# Altium PCB MCA_DA_AudioMetter-V2.PcbDoc
Units mil, origin at the board's own origin, x right, y up, seen from the top; angles counter-clockwise.
Board outline 6071 x 4499.19 mil, 2 copper layers (Top Layer, Bottom Layer); 113 components, 69 nets, 301 pads, 0 vias.
Unrouted connection lines stored in the file: 10.
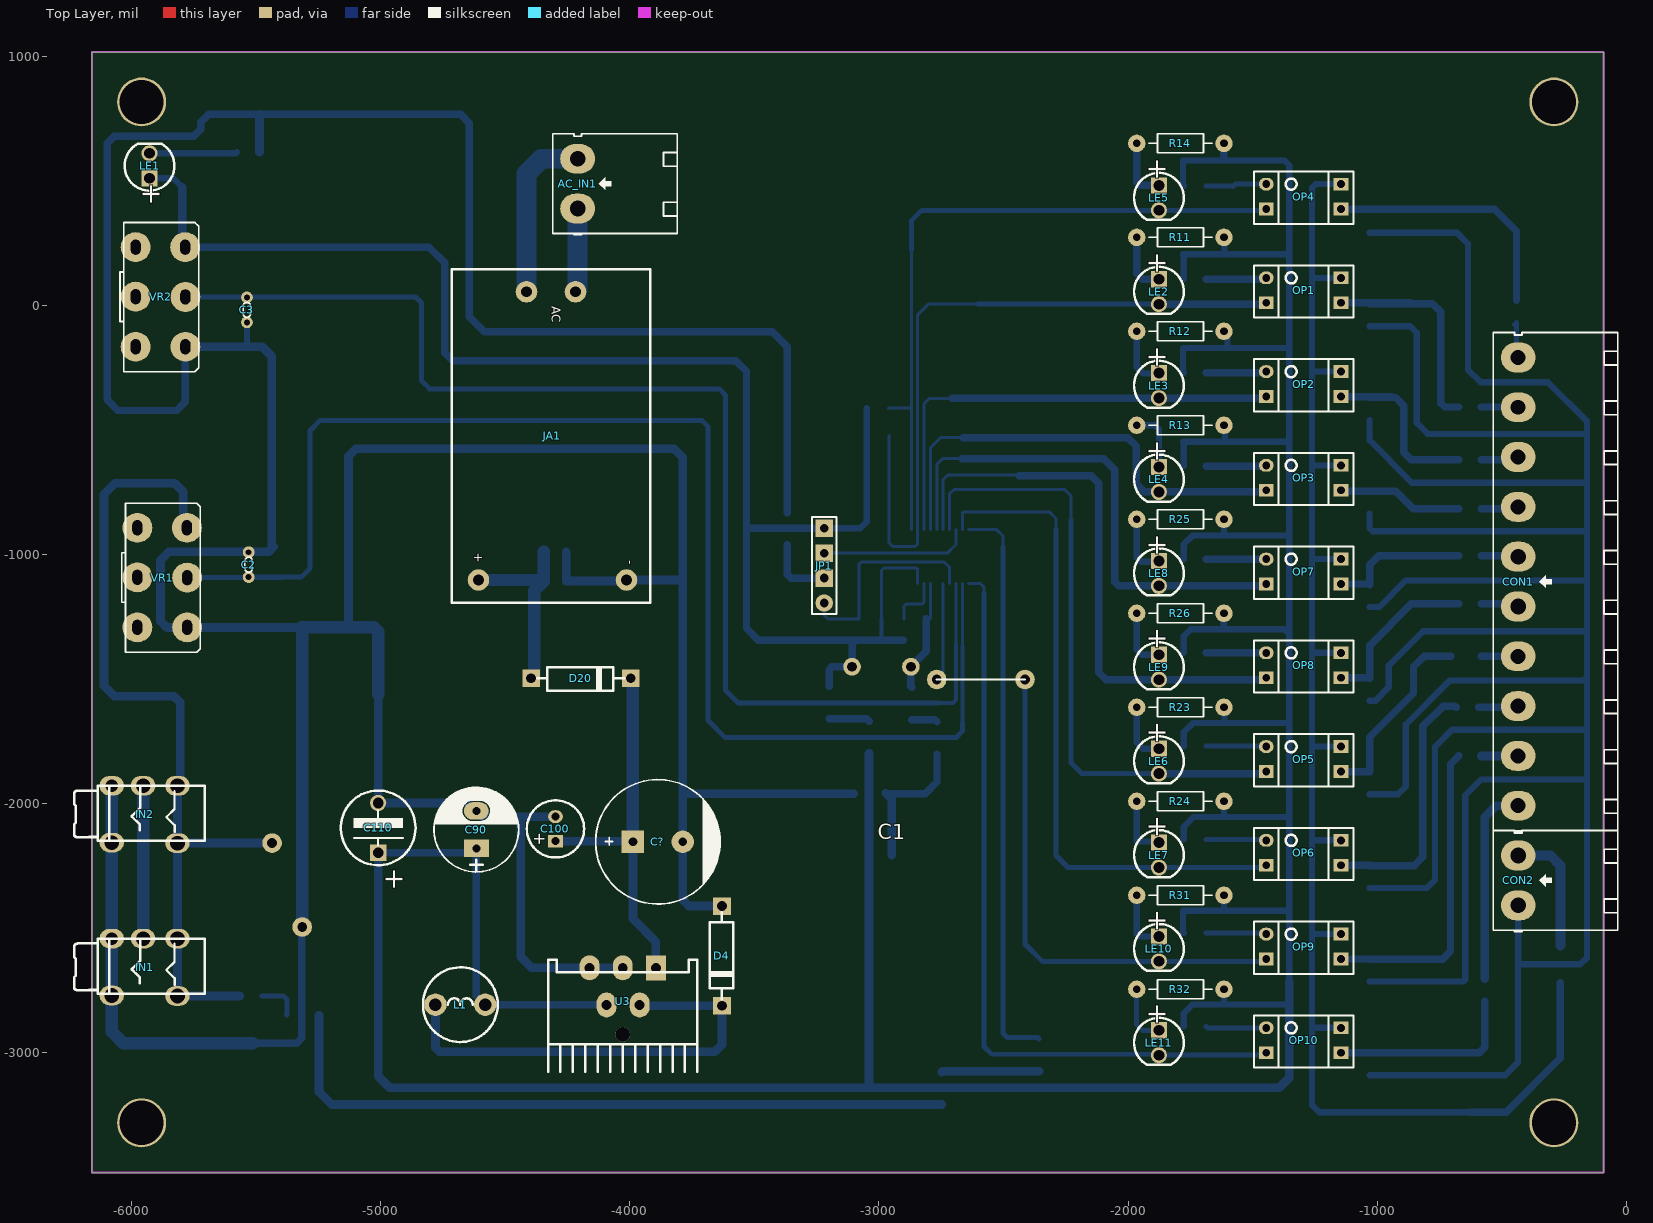
[diagram p0: Top Layer view]
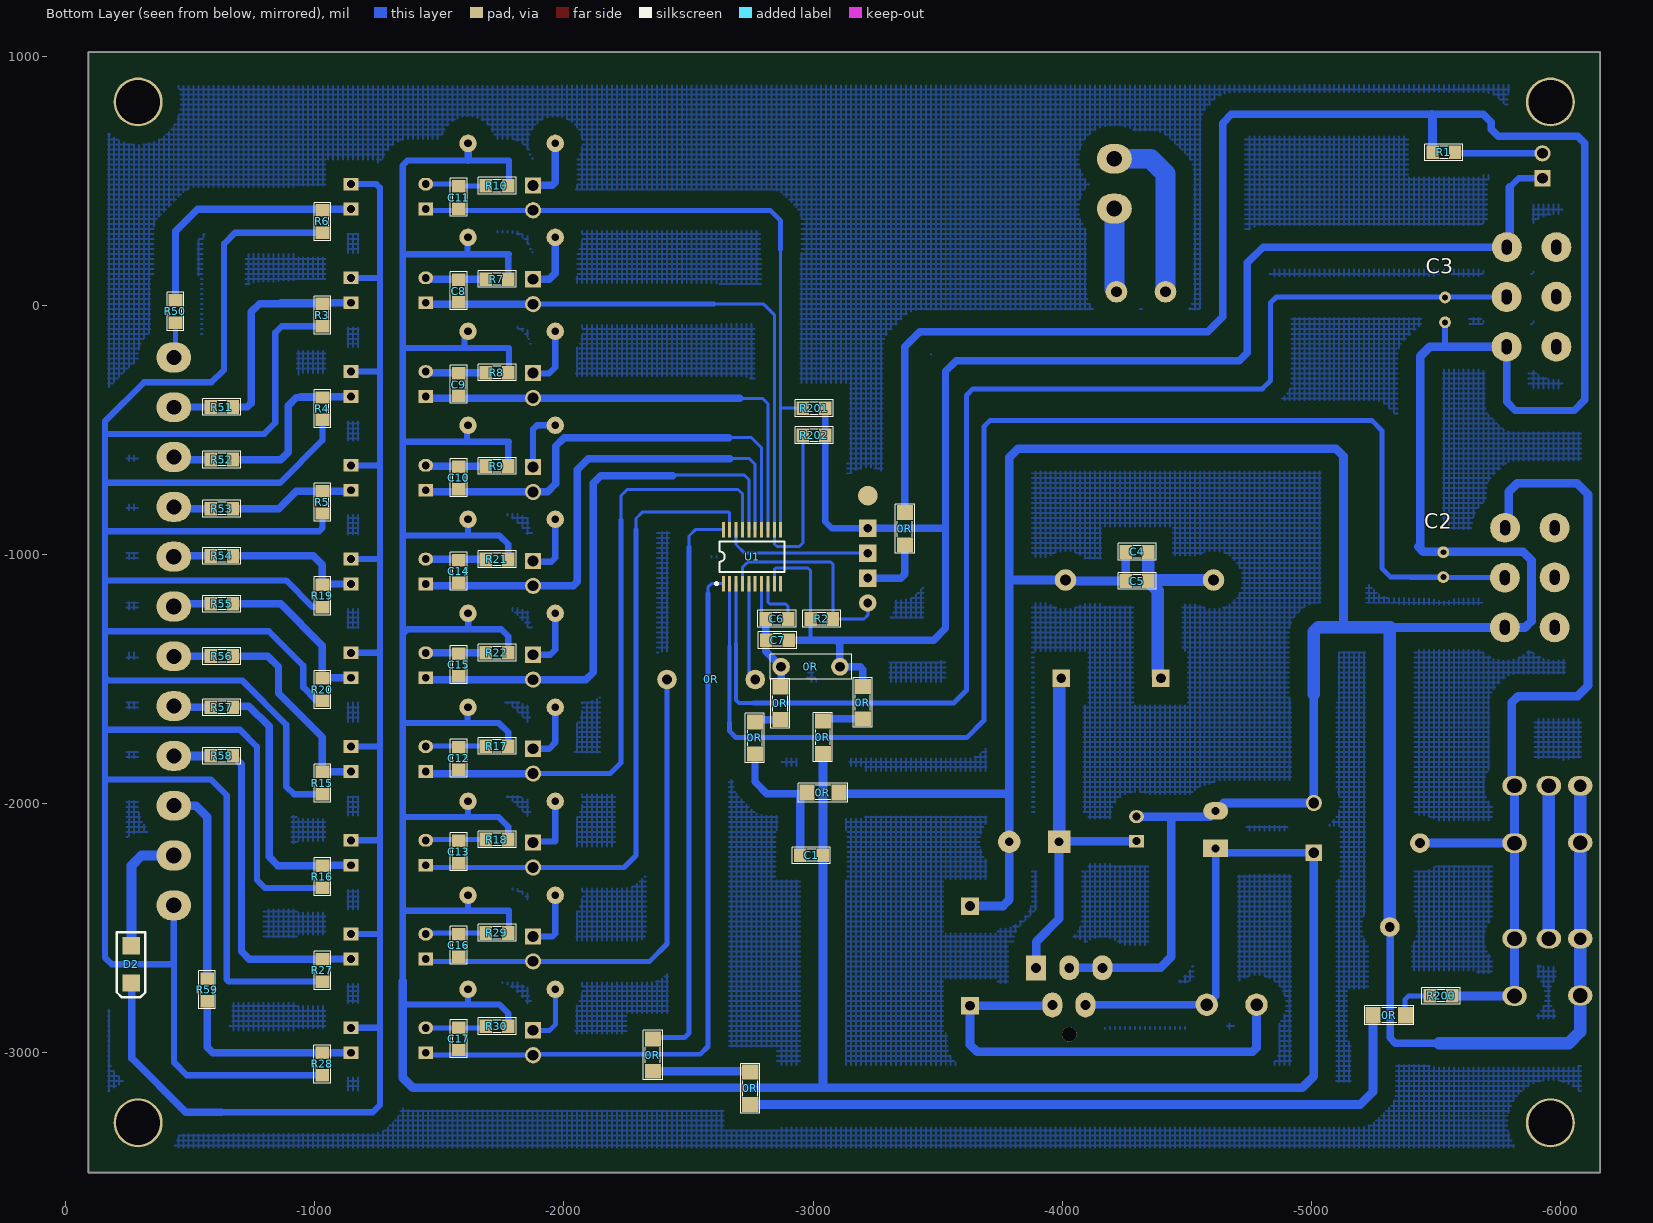
[diagram p1: Bottom Layer view, seen from below]

## Layer stack, top to bottom
Top Solder: solder mask 0.4, Solder Resist, Dk 3.5
Top Layer: signal copper 1.4
Dielectric 1: dielectric 12.6, FR-4, Dk 4.8
Bottom Layer: signal copper 1.4
Bottom Solder: solder mask 0.4, Solder Resist, Dk 3.5

## Board outline
-6161,-3483 -6161,1016.19 -90,1016.19 -90,-3483

## Design rules (kind name [scope] priority, off if disabled: settings)
Clearance [All] p1: gap=10 except(70: Arc-Poly Track-Poly SMDPad-Poly THPad-Poly Via-Poly Fill-Poly Poly-Poly)
PolygonConnect [All] p1: connectstyle=Relief reliefconductorwidth=10 reliefentries=4 polygonreliefangle="90 Angle" airgapwidth=10
RoomDefinition MCA_DA_AudioMetter-V2 [InComponentClass('MCA_DA_AudioMetter-V2')] p1: confinementstyle=ConfineIn formatcopy=TRUE lockcomponents=FALSE outline -18952.99,-6714.81 -16952.99,-6714.81 -16952.99,-5714.81 -18952.99,-5714.81
RoutingVias [All] p1: holewidth=28 width=50 viastyle="Through Hole" minholewidth=28 minwidth=50 maxholewidth=28 maxwidth=50
SolderMaskExpansion [All] p1: expansion=4
Width [All] p1: maxlimit=80 minlimit=12 preferedwidth=25
30 further rules are at their usual default settings.

## Components (designator, comment, footprint, x,y, rotation, side; value= is the part's Value field where it differs from the comment)
0R "Comment" GIM -2768,-1503 r0 bottom
0R "Comment" TRO_SMD_1206 -5316,-2854 r0 bottom
0R "Comment" TRO_SMD_1206 -2751,-3142.81 r270 bottom
0R "Comment" TRO_SMD_1206 -2360,-3009 r270 bottom
0R "Comment" TRO_SMD_1206 -3037,-1736.81 r90 bottom
0R "Comment" TU_TATA_5.08 -2990,-1451.81 r0 bottom
0R "Comment" TRO_SMD_1206 -3372,-895.81 r270 bottom
0R "Comment" TRO_SMD_1206 -3042,-1959.81 r0 bottom
0R "Comment" TRO_SMD_1206 -2764,-1739.81 r90 bottom
0R "Comment" TRO_SMD_1206 -2866,-1600.81 r90 bottom
0R "Comment" TRO_SMD_1206 -3197,-1597.78 r90 bottom
AC_IN1 "CON 2 EDG 5.08_MH" "CON 2 EDG 5.08" -4210,488 r90 top
C1 "104" 0805-CAP -2994,-2208.81 r180 bottom
C2 "Capacitor Ceramic" Tu-pico -5531,-991.81 r270 top
C3 "Capacitor Ceramic" Tu-pico -5537.99,-68.81 r90 top
C4 "104" 0805-CAP -4301,-990.81 r0 bottom
C5 "104" 0805-CAP -4301,-1107.81 r0 bottom
C6 "106" 0805-CAP -2855,-1259.81 r0 bottom
C7 "104" 0805-CAP -2858,-1344.81 r180 bottom
C8 "Capacitor Ceramic" "Tu 0805" -1578,56.86 r270 bottom
C9 "Capacitor Ceramic" "Tu 0805" -1578,-318.48 r270 bottom
C10 "Capacitor Ceramic" "Tu 0805" -1578,-693.81 r270 bottom
C11 "Capacitor Ceramic" "Tu 0805" -1578,432.19 r270 bottom
C12 "Capacitor Ceramic" "Tu 0805" -1578,-1819.81 r270 bottom
C13 "Capacitor Ceramic" "Tu 0805" -1578,-2195.14 r270 bottom
C14 "Capacitor Ceramic" "Tu 0805" -1578,-1069.14 r270 bottom
C15 "Capacitor Ceramic" "Tu 0805" -1578,-1444.48 r270 bottom
C16 "Capacitor Ceramic" "Tu 0805" -1578,-2570.48 r270 bottom
C17 "Capacitor Ceramic" "Tu 0805" -1578,-2945.81 r270 bottom
C90 "100uF/16V" "TU_HOA(100uF/35V - 470uF/16V)" -4617,-2105.81 r90 top
C100 "100uF - 35V" "TU HOA 8mm" -4299,-2102.81 r90 top
C110 "1000uF - 16V" "TU HOA 1000uF25V" -5011,-2098.81 r270 top
C? "10uF" CP2/5 -3888,-2154.81 r0 top
CON1 "CON 10 EDG 5.08_MH" "Con 10 EDG 5.08" -433.2,-1109.81 r90 top
CON2 "CON 2 EDG 5.08_MH" "CON 2 EDG 5.08" -433,-2309.81 r90 top
D2 "SS34" SOD80 -263,-2646.81 r90 bottom
D4 "ss34" SS14 -3633,-2593.81 r270 top
D20 "Diode 1N4001 DO41 1A 50V (DIP)_MH" SS14 -4216,-1500.81 r0 top
IN1 "Jack Audio 3.5MM PJ-327 5P_MH" "Jac audio 3.5" -5949,-2658.81 r0 top
IN2 "Jack Audio 3.5MM PJ-327 5P_MH" "Jac audio 3.5" -5949,-2044.81 r0 top
JA1 "AC - Input" "Nguon HiLink 5V" -4317,-524.81 r270 top
JP1 "ST-Link" "Jumper 4" -3220,-1144.81 r90 top
L1 "100uH/3A" L100uH3A -4681,-2808.81 r0 top
LE1 "LED" "LED_phi 3" -5929,560 r90 top
LE2 "LED" "LED_phi 3" -1876,54.19 r270 top
LE3 "LED" "LED_phi 3" -1876,-322.81 r270 top
LE4 "LED" "LED_phi 3" -1876,-699.81 r270 top
LE5 "LED" "LED_phi 3" -1876,431.19 r270 top
LE6 "LED" "LED_phi 3" -1876,-1830.81 r270 top
LE7 "LED" "LED_phi 3" -1876,-2207.81 r270 top
LE8 "LED" "LED_phi 3" -1876,-1076.81 r270 top
LE9 "LED" "LED_phi 3" -1876,-1453.81 r270 top
LE10 "LED" "LED_phi 3" -1876,-2584.81 r270 top
LE11 "LED" "LED_phi 3" -1876,-2961.81 r270 top
OP1 "PC817/EL817 5V 5mA DIP _MH" DIP4 -1445,109.74 r270 top
OP2 "PC817/EL817 5V 5mA DIP _MH" DIP4 -1445,-266.7 r270 top
OP3 "PC817/EL817 5V 5mA DIP _MH" DIP4 -1445,-643.14 r270 top
OP4 "PC817/EL817 5V 5mA DIP _MH" DIP4 -1445,486.19 r270 top
OP5 "PC817/EL817 5V 5mA DIP _MH" DIP4 -1445,-1772.48 r270 top
OP6 "PC817/EL817 5V 5mA DIP _MH" DIP4 -1445,-2148.92 r270 top
OP7 "PC817/EL817 5V 5mA DIP _MH" DIP4 -1445,-1019.59 r270 top
OP8 "PC817/EL817 5V 5mA DIP _MH" DIP4 -1445,-1396.03 r270 top
OP9 "PC817/EL817 5V 5mA DIP _MH" DIP4 -1445,-2525.37 r270 top
OP10 "PC817/EL817 5V 5mA DIP _MH" DIP4 -1445,-2901.81 r270 top
R1 "1K" 0805-RES -5533,614 r180 bottom
R2 "10K" 0805-RES -3035,-1259.81 r0 bottom
R3 "10k" "Tro SMD 0805" -1030,-39.7 r90 bottom
R4 "10k" "Tro SMD 0805" -1030,-415.59 r90 bottom
R5 "10k" "Tro SMD 0805" -1030,-791.48 r90 bottom
R6 "10k" "Tro SMD 0805" -1030,336.19 r90 bottom
R7 "220" "Tro SMD 0805" -1731,104.19 r0 bottom
R8 "220" "Tro SMD 0805" -1731,-270.81 r0 bottom
R9 "220" "Tro SMD 0805" -1731,-645.81 r0 bottom
R10 "220" "Tro SMD 0805" -1731,479.19 r0 bottom
R11 "1K" "TRO_VACH_ 1/4W" -1965,272.56 r0 top
R12 "1K" "TRO_VACH_ 1/4W" -1965,-104.89 r0 top
R13 "1K" "TRO_VACH_ 1/4W" -1965,-482.33 r0 top
R14 "1K" "TRO_VACH_ 1/4W" -1965,650 r0 top
R15 "10k" "Tro SMD 0805" -1030,-1919.14 r90 bottom
R16 "10k" "Tro SMD 0805" -1030,-2295.03 r90 bottom
R17 "220" "Tro SMD 0805" -1731,-1770.81 r0 bottom
R18 "220" "Tro SMD 0805" -1731,-2145.81 r0 bottom
R19 "10k" "Tro SMD 0805" -1030,-1167.37 r90 bottom
R20 "10k" "Tro SMD 0805" -1030,-1543.26 r90 bottom
R21 "220" "Tro SMD 0805" -1731,-1020.81 r0 bottom
R22 "220" "Tro SMD 0805" -1731,-1395.81 r0 bottom
R23 "1K" "TRO_VACH_ 1/4W" -1965,-1614.67 r0 top
R24 "1K" "TRO_VACH_ 1/4W" -1965,-1992.11 r0 top
R25 "1K" "TRO_VACH_ 1/4W" -1965,-859.78 r0 top
R26 "1K" "TRO_VACH_ 1/4W" -1965,-1237.22 r0 top
R27 "10k" "Tro SMD 0805" -1030,-2670.92 r90 bottom
R28 "10k" "Tro SMD 0805" -1029,-3046.81 r90 bottom
R29 "220" "Tro SMD 0805" -1731,-2520.81 r0 bottom
R30 "220" "Tro SMD 0805" -1731,-2895.81 r0 bottom
R31 "1K" "TRO_VACH_ 1/4W" -1965,-2369.56 r0 top
R32 "1K" "TRO_VACH_ 1/4W" -1965,-2747 r0 top
R50 "22R" "Tro SMD 0805" -440,-24.81 r90 bottom
R51 "22R" "Tro SMD 0805" -626,-408.81 r180 bottom
R52 "22R" "Tro SMD 0805" -626,-619.81 r180 bottom
R53 "22R" "Tro SMD 0805" -626,-816.81 r180 bottom
R54 "22R" "Tro SMD 0805" -626,-1006.81 r180 bottom
R55 "22R" "Tro SMD 0805" -626,-1198.81 r180 bottom
R56 "22R" "Tro SMD 0805" -626,-1408.81 r180 bottom
R57 "22R" "Tro SMD 0805" -626,-1614.81 r180 bottom
R58 "22R" "Tro SMD 0805" -626,-1809.81 r180 bottom
R59 "22R" "Tro SMD 0805" -567,-2749.81 r270 bottom
R200 "22R" "Tro SMD 0805" -5522,-2773 r180 bottom
R201 "10K" "Tro SMD 0805" -3004,-414 r0 bottom
R202 "10K" "Tro SMD 0805" -3004,-523 r0 bottom
U1 "STM8S003F3P6 TSSOP20 _MH" TSSOP20 -2755,-1009.81 r180 bottom
U3 "LM2576T TO220-5_MH" LM2576t -4028,-2827.81 r180 top
VR1 "20k" VR2-B -5878,-1093.81 r270 top
VR2 "20k" VR2-B -5885,33.19 r270 top

## Footprints (in the part's own frame and the unit in brackets; to place one, negate y for a bottom-side part, rotate by r counter-clockwise, add the part's x,y. Pads: shape width x height; smd on the part's side, far side on the other; paste and mask are expansions set on the pad)
0805-CAP [mil] "Compoment SMD 80x50mil"
  rect 50x55 smd: 1(-45,0) 2(45,0)
  silkscreen extent -77,-34 76,33, body extent -45,-24 34,25, height 31
0805-RES [mil] "Compoment SMD 80x50mil"
  rect 50x55 smd: 1(-45,0) 2(45,0)
  silkscreen extent -77,-34 76,33, body extent -48,-26 42,27, height 30
"CON 2 EDG 5.08" [mil]
  oval 120x140 hole 62.99: 1(-100,0) 2(100,0)
  silkscreen extent -205,-400 200,100, body extent -197,-399 197,73, height 334
"Con 10 EDG 5.08" [mil]
  oval 120x140 hole 60: 1(-900,0) 2(-700,0) 3(-500,0) 4(-300,0) 7(300,0) 8(500,0) 9(700,0) 10(900,0)
  oval 120x140 hole 62.99: 5(-100,0) 6(100,0)
  silkscreen extent -1005,-400 1000,100, body extent -996,-402 997,70, height 334
CP2/5 [mil] "Tu hoa 1000uF/25V,50V"
  rect 90x90 hole 35: 1(-100,0)
  round 90 hole 35: 2(100,0)
  silkscreen extent -250,-250 250,250, body extent -241,-247 251,245, height 984
DIP4 [mm] "W.300/L.400"
  oval 1.3x1.5 hole 0.8: 1(0,0)
  rect 1.3x1.5 hole 0.8: 2(2.54,0) 3(2.54,7.62) 4(0,7.62)
  silkscreen extent -1.27,-1.27 4.06,8.89, body extent -1.27,-1.27 4.06,8.89, height 5
GIM [mm]
  round 2 hole 1: 1(0,0) 1(9,0)
"Jac audio 3.5" [mm] "JAC audio 3.5"
  oval 2.5x2 hole 1.5: 1(-3.35,-2.875) 3(-0.15,2.925) 4(3.35,-2.925) 5(3.35,2.925)
  oval 2.5x2 hole 1.3: 2(-3.35,2.925)
  silkscreen extent -7.19,-2.7 6.15,2.9
"Jumper 4" [mil]
  round 70 hole 35 unplated: 1(-51,0)
  rect 70x70 hole 35 unplated: 2(49,0) 3(149,0) 4(249,0)
  silkscreen extent -95,-49 295,49
L100uH3A [mil] "100uH3A"
  round 90 hole 50: 1(-100,0) 2(100,0)
  silkscreen extent -150,-150 150,150
"LED_phi 3" [mil] "LED phi 3"
  rect 65x65 hole 43.31: 1(-50,0)
  round 65 hole 43.31: 2(50,0)
  silkscreen extent -100,-100 88,100
LM2576t [mil]
  rect 80x100 hole 40: 1(-132,-167.09)
  oval 80x100 hole 40: 2(-67,-18) 3(1,-167) 4(66,-18) 5(134,-167)
  round 59.06 hole 59.06: ""(1,100)
  silkscreen extent -299,-200 301,250, body extent -199,-175 201,150, height 859
"Nguon HiLink 5V" [mm] "HiLink 5V 3W"
  round 2.2 hole 1.1: 1(-14.7,-2.5) 2(-14.7,2.5) 3(14.7,-7.4) 4(14.7,7.7)
  silkscreen extent -17,-10.1 17,10.1
SOD80 [mil]
  rect 70x70 smd: 1(74.8,0) 2(-74.8,0)
  silkscreen extent -133,-56 129,59, body extent -73,-34 73,29, height 63
SS14 [mm]
  rect 1.8x1.8 hole 1: 1(-4.595,0.064) 2(5.565,0.064)
  silkscreen extent -3.96,-1.21 4.93,1.21, body extent -4.98,-1.22 5.95,1.35, height 2.55
"Tro SMD 0805" [mil]
  rect 50x55 smd: 1(-45,0) 2(45,0)
  silkscreen extent -77,-34 76,33, body extent -62,-28 56,27, height 21
TRO_SMD_1206 [mil]
  rect 60x65 smd: 1(-63,-3) 2(67,-3)
  silkscreen extent -97,-41 101,36, body extent -81,-38 85,33, height 25
"TRO_VACH_ 1/4W" [mil] "R 1/4W, 2 Pin, 350mil"
  round 70 hole 31: 1(0,0) 2(350,0)
  silkscreen extent 48,-38 302,38, body extent -40,-47 386,47, height 111
TSSOP20 [mm] "Shrink Small Outline; 20 Leads; Body Width 4.4 mm; Pitch 0.65 mm"
  rect 0.3x1.6 smd: 1(-2.925,-2.75) 2(-2.275,-2.75) 3(-1.625,-2.75) 4(-0.975,-2.75) 5(-0.325,-2.75) 6(0.325,-2.75) 7(0.975,-2.75) 8(1.625,-2.75) 9(2.275,-2.75) 10(2.925,-2.75) 11(2.925,2.75) 12(2.275,2.75) 13(1.625,2.75) 14(0.975,2.75) 15(0.325,2.75) 16(-0.325,2.75) 17(-0.975,2.75) 18(-1.625,2.75) 19(-2.275,2.75) 20(-2.925,2.75)
  silkscreen extent -3.75,-2.87 3.3,1.55
"Tu 0805" [mil] "Compoment SMD 80x50mil"
  rect 50x55 smd: 1(-45,0) 2(45,0)
  silkscreen extent -77,-34 76,33, body extent -40,-27 40,23, height 24
"TU HOA 8mm" [mm]
  rect 1.3x1.5 hole 0.8: 1(-1.25,0)
  oval 1.3x1.5 hole 0.8: 2(1.25,0)
  silkscreen extent -2.92,-2.92 2.92,2.92, body extent -3.15,-3.15 3.16,3.15, height 11.51
"TU HOA 1000uF25V" [mil]
  rect 65x65 hole 43.31: 1(100,0)
  round 65 hole 43.31: 2(-100,0)
  silkscreen extent -150,-150 150,150, body extent -195,-200 205,200, height 400
Tu-pico [mm] "Tu gom mini"
  round 1.2 hole 0.6: 1(0,0) 2(2.54,0)
  silkscreen extent 0.51,-0.38 2.03,0.38, body extent -1.65,-0.85 4.19,0.85, height 6.12
"TU_HOA(100uF/35V - 470uF/16V)" [mil]
  rect 70x100 hole 32: 1(-75,0)
  oval 70x100 hole 32: 2(75,0)
  silkscreen extent -170,-170 170,170, body extent -160,-157 155,157, height 446
TU_TATA_5.08 [mm]
  round 1.8 hole 1: 1(-3,0) 2(3,0)
  silkscreen extent -4.2,-1.3 4.1,1.3, body extent -2.79,-1.16 2.79,1, height 6.27
VR2-B [mil]
  round 120 hole 40 slot 60 at 0 deg: 1(-200,-100) 2(-1,-100) 3(200,-100) 4(-200,99) 5(0,100) 6(200,100)
  silkscreen extent -299,-163 300,153, body extent -339,-1409 331,199, height 835

## Part data
AC_IN1 CON2: "CON 2 EDG 5.08 (xanh cong)"
C1 C4 C5 C6 C7: library part "CAP SMD", "Capacitor"
C2 C3 C8 C9 C10 C11 C12 C13 C14 C15 C16 C17: library part CapCeramic, "Capacitor"
C90: library part TU_HOA_100uF_16V_MH, "TU_HOA_100uF_16V"
C100: library part "Tu Hoa 100uF 35V", "C?m"
C110: library part "Tu Nhom 1000uF - 16V", "Dán"
C?: library part TU_HOA_47uF_100V_MH, "TU_HOA_47uF_100V_MH"
CON1: "CON 10 EDG 5.08 (xanh cong)"
D2: library part "Diode 1N4148 SOD80 450mA 100V ( LL34 1N4148 SMD)_MH", "Diode 1N4148 SOD80 450mA 100V ( LL34 1N4148 SMD)"
D4: library part "Diode 1N4007 1A_MH", "Diode 1N4007 1A"
D20: "Diode 1N4001 DO41 1A 50V (DIP)"
JA1: library part NGUON_KHONGVO
JP1: library part "Jump 4_MH", "Jump 4P 2.54"
L1: library part L100uH3A, "Cuon cam"
LE1 LE2 LE3 LE4 LE5 LE6 LE7 LE8 LE9 LE10 LE11: library part LED_DIP_3MM
R1 R2: library part RESSMD
R3 R4 R5 R6 R7 R8 R9 R10 R11 R12 R13 R14 R15 R16 R17 R18 R19 R20 R21 R22 R23 R24 R25 R26 R27 R28 R29 R30 R31 R32 R50 R51 R52 R53 R54 R55 R56 R57 R58 R59 R200 R201 R202: library part TRO_SMD_0805_MH, "TRO_SMD_0805"
U3: "SIMPLE SWITCHER; 3A Step-Down Voltage Regulator"
VR1 VR2: library part "Triet Ap Doi 20k_MH", "Triet Ap Doi 20k"

## Free pads (board coordinates)
  round 196.85 hole 177.17: 2(-5961,-3283) 3(-290,-3283) 4(-290,816.19) 5(-5961,816.19)
  round 78.74 hole 39.37: 6(-5437,-2159.81) 7(-5316,-2496.81)
  round 78.74 smd far side: 8(-3220,-765)

## Nets (pads, with @x,y where several pads share a name; then routed paths per layer and width w, separated by ;. In a path a pad name is that pad's centre, name@x,y a point inside that pad or via, vN(x,y) a via of type N, cw(c..) or ccw(c..) an arc to the next point about the centre after c; other vN are vias at no path point)
24V: D2.2 OP1.4 OP2.4 OP3.4 OP4.4 OP5.4 OP6.4 OP7.4 OP8.4 OP9.4 OP10.4 | length 6269.2
  Bottom Layer w25: OP10.4 -1256,-2901.81 -1261,-2896.81 ; OP9.4 -1257.44,-2525.37 -1261,-2521.81 ; OP6.4 -1252.89,-2148.92 -1261,-2140.81 ; OP5.4 -1259.33,-1772.48 -1261,-1770.81 ; OP8.4 -1250.78,-1396.03 -1261,-1385.81 ; OP7.4 -1257.22,-1019.59 -1261,-1015.81 ; OP3.4 -1252.67,-643.14 -1261,-634.81 ; OP2.4 -1260.89,-266.7 -1261,-266.81 ; OP1.4 -1256.44,109.74 -1261,105.19 ; OP4.4 -1247,486.19 -1261,472.19 -1261,105.19 ; -625,-3240.81 -1232,-3240.81 -1261,-3211.81 -1261,-2896.81 ; -1261,-2896.81 -1261,-2521.81 ; -1261,-2521.81 -1261,-2140.81 ; -1261,-2140.81 -1261,-1770.81 ; -1261,-1770.81 -1261,-1385.81 ; -1261,-1385.81 -1261,-1015.81 ; -1261,-1015.81 -1261,-634.81 ; -1261,-634.81 -1261,-266.81 ; -1261,-266.81 -1261,105.19
  Bottom Layer w30: -625,-3240.81 -481.81,-3240.81 -264,-3023 D2.2@-264,-2721.61
ADC: IN1.4 IN1.5 IN2.4 IN2.5 pad.6 R200.2 VR1.4 | length 3408.3
  Bottom Layer w35: IN2.5 IN2.4 ; IN2.5@-5806.11,-1929.64 -5806.11,-1595.7 -5832,-1569.81 -6070,-1569.81 -6112,-1527.81 -6112,-758.81 -6068,-714.81 -5828,-714.81 -5794,-748.81 VR1.4@-5794,-894.81 ; R200.2 -5567.98,-2773.98 IN1.4 IN1.5 IN2.4 ; pad.6 -5816.94,-2159.81 IN2.4
ADC1: C3.2 U1.3 VR2.5 | length 5119.2
  Bottom Layer w12: -2691.02,-1360.83 U1.3
  Bottom Layer w15: -2761,-1597.78 -2702.97,-1597.78 -2691.02,-1585.83 -2691.02,-1360.83
  Bottom Layer w20: VR2.5 -4861,33.19 -4837,9.19 -4837,-302.81 -4804,-335.81 -3642,-335.81 -3616,-361.81 -3616,-1546.81 -3566,-1596.81 -2761.97,-1596.81 -2761,-1597.78
ADC2: C2.2 U1.2 VR1.5 | length 5653.2
  Bottom Layer w12: U1.2 -2665,-1118.51 -2665,-1369.81
  Bottom Layer w15: -2665,-1677.81 -2665,-1369.81
  Bottom Layer w20: VR1.5 -5400,-1093.81 -5402,-1091.81 ; C2.2 -5402,-1091.81 ; -2665,-1677.81 -2665,-1710.81 -2691,-1736.81 -3617,-1736.81 -3686,-1667.81 -3686,-487.81 -3710,-463.81 -5245,-463.81 -5284,-502.81 -5284,-1056 -5319.81,-1091.81 -5402,-1091.81
GND: 0R.1@-2767,-1802.81 0R.1@-2869,-1663.81 0R.1@-3105,-1956.81 0R.1@-3369,-832.81 0R.2@-2767,-1672.81 0R.2@-2869,-1533.81 0R.2@-2871.89,-1451.81 0R.2@-2975,-1956.81 0R.2@-3369,-962.81 C1.1 C2.1 C3.1 C4.2 C5.2 C6.2 C7.1 C90.2 C100.2 C110.2 C?.2 D4.1 IN1.1 IN1.2 IN2.1 IN2.2 JA1.4 JP1.2 pad.7 R1.1 U1.7 U3.3 U3.5 VR1.6 VR2.6 | length 21420.9
  Bottom Layer w12: C6.2@-2793.39,-1258.2 U1.7
  Bottom Layer w25: -5537.99,-161.8 C3.1
  Bottom Layer w30: VR2.6 -5785,-387.81 -5820,-422.81 -6056,-422.81 -6099,-379.81 -6099,650 -6071,678 -5751,678 -5723,706 -5723,735.19 -5692,766.19 -5485,766.19 -4680,766.19 -4645,731.19 -4645,-46.81 -4585,-106.81 -3429,-106.81 -3369,-166.81 0R.1@-3369,-832.81 ; -5514,-2962.81 -5338.81,-2962.81 -5317,-2941 -5317,-2497.81 pad.7 ; 0R.2@-3369,-962.81 -3369,-1079.81 -3353,-1095.81 JP1.2 ; 0R.2@-2975,-1956.81 -2970,-1961.81 -2815,-1961.81 -2767,-1913.81 0R.1@-2767,-1802.81 ; 0R.1@-2869,-1663.81 -2776,-1663.81 0R.2@-2767,-1672.81 ; 0R.2@-2869,-1533.81 -2871.89,-1530.92 -2871.89,-1451.81 -2810,-1389.92 C6.2
  Bottom Layer w35: VR2.6 -5476,-166.81 -5438,-204.81 -5438,-969.81 ; R1.1 -5488,763.19 -5485,766.19 ; -5431,-969.81 -5451,-989.81 -5851,-989.81 -5885,-1023.81 -5885,-1267.81 -5858,-1294.81 -5858,-1293.81 VR1.6 -5319,-1293.81 ; -5130,-1293.81 -5130,-606.81 -5100,-576.81 -3823,-576.81 -3788,-611.81 -3788,-1103.81 ; -5011,-1563 C110.2 -4649,-1998.81 C90.2 -4594.21,-2053.6 -4439,-2053.6 ; C100.2 -4439,-2053.6 ; C4.2 C5.2 -4018.11,-1107.81 JA1.4 -3788.26,-1103.55 -3788,-1103.81 ; U3.3 U3.5 -4395,-2660.81 -4439,-2616.81 -4439,-2053.6 ; D4.1 -3762.91,-2412.91 -3788,-2387.81 C?.2 -3788,-1963.81 ; 0R.1@-3101,-1961.81 -3786,-1961.81 -3788,-1963.81 ; 0R.2@-2970,-1961.81 -2949,-1982.81 C1.1 ; -3788,-1963.81 -3788,-1103.81
  Bottom Layer w50: IN2.2 IN2.1 IN1.2 IN1.1 -6080.89,-2916.92 -6035,-2962.81 -5514,-2962.81 ; pad.7 -5316,-1296.81 -5319,-1293.81 -5130,-1293.81 -5028.19,-1293.81 -5011,-1311 -5011,-1563
GND_24V: CON2.1 R3.1 R4.1 R5.1 R6.1 R15.1 R16.1 R19.1 R20.1 R27.1 R28.1 | length 14795.6
  Bottom Layer w25: R27.1 -653.92,-2715.92 -646,-2708 -646,-1968 -583,-1905 -164,-1905 -157,-1898 ; R16.1 -799.03,-2340.03 -767,-2308 -767,-1773 -699,-1705 -164,-1705 -157,-1698 ; R15.1 -916.14,-1964.14 -885,-1933 -885,-1684 -708,-1507 -170,-1507 -157,-1494 ; R20.1 R20.1@-1007.26,-1588.26 ; R19.1 -991.37,-1212.37 -884,-1105 -161,-1105 -157,-1101 ; R5.1 -1030,-895 -1017,-908 -159,-908 -157,-910 ; R4.1 -1030,-542.81 -860,-712.81 -157,-712.81 ; R3.1 -866.3,-84.7 -841,-110 -841,-472.81 -797,-516.81 -157,-516.81 ; R6.1 -679,291.19 -635,247.19 -635,-259 -584.19,-309.81 -314,-309.81 -157,-466.81 -157,-516.81 ; R28.1 -485,-3091.81 -434,-3040.81 -434,-2589.81 ; -954,-1535 R20.1@-1007.26,-1588.26 ; CON2.1 -433,-2633.81 -420,-2646.81 -184,-2646.81 -157,-2619.81 -157,-1898 ; R20.1@-1007.26,-1588.26 -1006.26,-1588.26 -953,-1535 -953,-1447 -815,-1309 -161,-1309 -157,-1305 ; -157,-1898 -157,-1698 ; -157,-1698 -157,-1494 ; -157,-1494 -157,-1305 ; -157,-1305 -157,-1101 ; -157,-1101 -157,-910 ; -157,-910 -157,-712.81 ; -157,-712.81 -157,-516.81
IN1: C4.1 C5.1 D20.1 JA1.3 | length 792.7
  Bottom Layer w50: JA1.3 -4350.26,-1103.55 C5.1 ; D20.1 -4384,-1485.39 -4384,-1145.81 C5.1 ; C4.1 C5.1
NetAC_IN1_1: AC_IN1.1 JA1.2 | length 337.6
  Bottom Layer w80: JA1.2 -4210,62.5 AC_IN1.1
NetAC_IN1_2: AC_IN1.2 JA1.1 | length 704.3
  Bottom Layer w80: JA1.1 -4415.43,528 -4355.43,588 AC_IN1.2
NetC8_1: C8.1 OP1.1 R7.2 | length 243.3
  Bottom Layer w30: R7.2 -1450.56,104.19 OP1.1
NetC9_1: C9.1 OP2.1 R8.2 | length 242.7
  Bottom Layer w30: R8.2 -1449.11,-270.81 OP2.1
NetC10_1: C10.1 OP3.1 R9.2 | length 242.1
  Bottom Layer w30: R9.2 -1447.67,-645.81 OP3.1
NetC11_1: C11.1 OP4.1 R10.2 | length 245.6
  Bottom Layer w20: R10.2 -1580,479.19 C11.1 -1569,486.19 OP4.1
NetC12_1: C12.1 OP5.1 R17.2 | length 241.7
  Bottom Layer w20: R17.2 -1446.67,-1770.81 OP5.1
NetC13_1: C13.1 OP6.1 R18.2 | length 242.3
  Bottom Layer w20: R18.2 -1448.11,-2145.81 OP6.1
NetC14_1: C14.1 OP7.1 R21.2 | length 241.5
  Bottom Layer w30: R21.2 -1446.22,-1020.81 OP7.1
NetC15_1: C15.1 OP8.1 R22.2 | length 241.1
  Bottom Layer w30: R22.2 -1445.22,-1395.81 OP8.1
NetC16_1: C16.1 OP9.1 R29.2 | length 242.9
  Bottom Layer w20: R29.2 -1449.56,-2520.81 OP9.1
NetC17_1: C17.1 OP10.1 R30.2 | length 243.5
  Bottom Layer w20: R30.2 -1680,-2901.81 OP10.1
NetC100_1: C100.1 C?.1 D20.2 U3.1 | length 1516.4
  Bottom Layer w35: C100.1 -3990.79,-2152.02 C?.1 -3988,-2463.81 -3896,-2555.81 U3.1
  Bottom Layer w50: D20.2 -3988,-1507.2 C?.1
NetCON1_1: CON1.1 R59.1 | length 802.4
  Bottom Layer w35: R59.1 -567,-2054.81 -522,-2009.81 CON1.1
NetCON1_2: CON1.2 R58.1 | length 147.8
  Bottom Layer w35: R58.1 CON1.2
NetCON1_3: CON1.3 R57.1 | length 160.9
  Bottom Layer w30: R57.1@-592,-1614.81 -438.2,-1614.81 CON1.3
NetCON1_4: CON1.4 R56.1 | length 148.2
  Bottom Layer w30: R56.1 -434.2,-1408.81 CON1.4
NetCON1_5: CON1.5 R55.1 | length 152.4
  Bottom Layer w30: R55.1 -444.2,-1198.81 CON1.5
NetCON1_6: CON1.6 R54.1 | length 149
  Bottom Layer w30: R54.1 -436.2,-1006.81 CON1.6
NetCON1_7: CON1.7 R53.1 | length 150.7
  Bottom Layer w30: R53.1 -440.2,-816.81 CON1.7
NetCON1_8: CON1.8 R52.1 | length 151.9
  Bottom Layer w30: R52.1 -443.2,-619.81 CON1.8
NetCON1_9: CON1.9 R51.1 | length 148.2
  Bottom Layer w30: R51.1 -434.2,-408.81 CON1.9
NetCON1_10: CON1.10 R50.1 | length 153
  Bottom Layer w20: R50.1@-447.2,-77.01 R50.1 -440,-203.01 CON1.10
NetCON2_2: CON2.2 D2.1 | length 508.2
  Bottom Layer w40: CON2.2 -304,-2209.81 -263,-2250.81 D2.1
NetD4_2: D4.2 L1.1 U3.2 | length 1830.1
  Bottom Layer w35: L1.1 -4781,-2981.81 -4765,-2997.81 -3659,-2997.81 -3630.48,-2969.29 D4.2 -3957.91,-2812.91 U3.2
NetIN1_3: IN1.3 IN2.3 | length 614
  Bottom Layer w50: IN1.3 IN2.3
NetLE1_2: LE1.2 R1.2 | length 352.7
  Bottom Layer w25: LE1.2 -5582,610 R1.2
NetLE2_1: LE2.1 R11.1 | length 243.4
  Bottom Layer w30: R11.1 -1965,128 -1941.19,104.19 LE2.1
NetLE3_1: LE3.1 R12.1 | length 244
  Bottom Layer w25: R12.1 -1965,-249 -1940,-274 -1877.19,-274 LE3.1
NetLE4_1: LE4.1 R13.1 | length 247.3
  Bottom Layer w25: R13.1 -1891.67,-482.33 -1876,-498 LE4.1
NetLE5_1: LE5.1 R14.1 | length 250.3
  Bottom Layer w30: R14.1 -1965,494 -1952.19,481.19 LE5.1
NetLE6_1: LE6.1 R23.1 | length 240.6
  Bottom Layer w25: R23.1 -1965,-1756 -1940.19,-1780.81 LE6.1
NetLE7_1: LE7.1 R24.1 | length 251.3
  Bottom Layer w25: R24.1 -1965,-2152 -1963,-2154 -1879.81,-2154 LE7.1
NetLE8_1: LE8.1 R25.1 | length 251.2
  Bottom Layer w25: R25.1 -1965,-1014 -1949,-1030 -1879.19,-1030 LE8.1
NetLE9_1: LE9.1 R26.1 | length 244
  Bottom Layer w25: R26.1 -1965,-1384 -1945.19,-1403.81 LE9.1
NetLE10_1: LE10.1 R31.1 | length 247.9
  Bottom Layer w25: R31.1 -1965,-2524 -1954.19,-2534.81 LE10.1
NetLE11_1: LE11.1 R32.1 | length 240.4
  Bottom Layer w20: R32.1 -1965,-2889 -1942.19,-2911.81 LE11.1
NetR200_1: 0R.1@-2357,-2946 0R.1@-2748,-3079.81 0R.1@-5379,-2851 0R.2@-2357,-3076 0R.2@-2748,-3209.81 0R.2@-5249,-2851 R200.1 U1.20 | length 5690.2
  Bottom Layer w12: U1.20 -2527.46,-901.54 -2502,-927 -2502,-971
  Bottom Layer w20: R200.1 -5392,-2773 -5378,-2787 -5378,-2850 0R.1@-5379,-2851 ; -2502,-971 -2502,-2923 -2484,-2941 -2362,-2941 0R.1@-2357,-2946
  Bottom Layer w35: 0R.2@-5249,-2851 -5249,-3158 -5197.19,-3209.81 0R.2@-2748,-3209.81 ; 0R.1@-2748,-3079.81 -2744.19,-3076 0R.2@-2357,-3076
OUT1: C11.2 LE5.2 OP4.2 R201.2 U1.11 | length 2777.5
  Bottom Layer w12: R201.2@-2962,-414 -2961,-413 -2870.16,-413 ; U1.11 -2870.16,-413 ; -2870.16,223 -2870.16,-413
  Bottom Layer w20: -2870.16,223 -2870.16,339 -2827.97,381.19 LE5.2 -1450,381.19 OP4.2
OUT1.1: OP4.3 R6.2 R50.2 | length 1018.9
  Bottom Layer w30: OP4.3 -529,386.19 -440,297.19 R50.2
OUT1.2: OP1.3 R3.2 R51.2 | length 1025.8
  Bottom Layer w30: OP1.3 -864,9.74 ; R3.2 -777.3,5.3 -745,-27 -745,-392.81 -729,-408.81 R51.2
OUT1.3: OP2.3 R4.2 R52.2 | length 774.1
  Bottom Layer w30: OP2.3 -942,-366.7 ; R4.2 -925.41,-370.59 -892,-404 -892,-589.81 -862,-619.81 R52.2
OUT1.4: OP3.3 R5.2 R53.2 | length 504.5
  Bottom Layer w30: OP3.3 -1141.67,-746.48 R5.2 -925,-746.48 -854.67,-816.81 R53.2
OUT1.5: OP7.3 R19.2 R54.2 | length 570.5
  Bottom Layer w30: OP7.3 -1031,-1119.59 -1031,-1121.37 R19.2 -1030,-1043 -993.81,-1006.81 R54.2
OUT1.6: OP8.3 R20.2 R55.2 | length 674.9
  Bottom Layer w30: OP8.3 R20.2@-1030,-1496.03 ; R20.2 R20.2@-1030,-1496.03 ; R55.2 -861.81,-1198.81 -1030,-1367 R20.2@-1030,-1496.03
OUT1.7: OP5.3 R15.2 R56.2 | length 779.2
  Bottom Layer w30: OP5.3 -1143.33,-1874.14 R15.2 -1030,-1734 -853.59,-1557.59 -853.59,-1452.41 -810,-1408.81 -703,-1408.81
OUT1.8: OP6.3 R16.2 R57.2 | length 1037.3
  Bottom Layer w30: OP6.3 R16.2@-1030,-2248.92 ; R16.2 -851.03,-2250.03 -816,-2215 -816,-1690.81 -735,-1609.81 -687,-1609.81 R57.2@-682,-1614.81
OUT1.9: OP9.3 R27.2 R58.2 | length 1252.1
  Bottom Layer w30: OP9.3 R27.2@-1030,-2625.37 ; R27.2 -735.92,-2625.92 -705,-2595 -705,-1843.81 R58.2
OUT1.10: OP10.3 R28.2 R59.2 | length 772.1
  Bottom Layer w30: OP10.3 R28.2 -589,-3001.81 -567,-2979.81 R59.2
OUT2: C8.2 LE2.2 OP1.2 R202.2 U1.12 | length 2896.2
  Bottom Layer w12: R202.2 -2959,-955 -2945,-969 -2855,-969 -2844.57,-958.57 U1.12 -2844.57,-38.38 -2802,4.19 -2602,4.19
  Bottom Layer w20: -2602,4.19 LE2.2
  Bottom Layer w30: LE2.2 -1450.56,4.19 OP1.2
OUT3: C9.2 LE3.2 OP2.2 U1.13 | length 1888.9
  Bottom Layer w12: U1.13 -2818.98,-395.81 -2797.98,-374.81 -2707,-374.81
  Bottom Layer w30: -2705,-372.81 LE3.2 -1451.11,-372.81 OP2.2
OUT4: C10.2 LE4.2 OP3.2 U1.14 | length 1876
  Bottom Layer w12: U1.14 -2793.39,-572.2 -2753,-531.81 -2662,-531.81
  Bottom Layer w30: -2662,-531.81 -2001,-531.81 -1966,-566.81 -1966,-717.81 -1934,-749.81 LE4.2 -1451.67,-749.81 OP3.2
OUT5: C14.2 LE8.2 OP7.2 U1.15 | length 2073.9
  Bottom Layer w12: U1.15 -2767.8,-637.81 -2766,-637.81 -2744,-615.81 -2666,-615.81
  Bottom Layer w30: -2666,-615.81 -2098,-615.81 -2053,-660.81 -2053,-1110.81 -2037,-1126.81 LE8.2 -1452.22,-1126.81 OP7.2
OUT6: C15.2 LE9.2 OP8.2 U1.16 | length 2294.3
  Bottom Layer w12: U1.16 -2742.2,-700.02 -2725,-682.81 -2439,-682.81 -2437,-684.81
  Bottom Layer w30: -2437,-684.81 -2147,-684.81 -2117,-714.81 -2117,-1474.81 -2088,-1503.81 LE9.2 -1452.78,-1503.81 OP8.2
OUT7: C12.2 LE6.2 OP5.2 U1.17 | length 2527.6
  Bottom Layer w12: U1.17 -2716.61,-757.43 -2699,-739.81 -2254,-739.81 -2229,-764.81 -2229,-862.81
  Bottom Layer w20: -2229,-862.81 -2229,-1837.81 -2186,-1880.81 LE6.2
  Bottom Layer w30: LE6.2 -1453.33,-1880.81 OP5.2
OUT8: C13.2 LE7.2 OP6.2 U1.19 | length 2676.7
  Bottom Layer w12: U1.19 -2665.43,-835.24 -2660,-829.81 -2316,-829.81 -2289,-856.81 -2289,-900.81
  Bottom Layer w20: -2289,-900.81 -2289,-2209.81 -2241,-2257.81 LE7.2 -1453.89,-2257.81 OP6.2
OUT9: 0R.1@-2413.67,-1503 0R.1@-2768,-1503 C16.2 LE10.2 OP9.2 U1.5 | length 2459.2
  Bottom Layer w12: 0R.1@-2768,-1503 -2742.2,-1477.2 U1.5
  Bottom Layer w20: 0R.1@-2413.67,-1503 -2413.67,-2565.14 -2344,-2634.81 LE10.2 -1454.44,-2634.81 OP9.2
OUT10: C17.2 LE11.2 OP10.2 U1.1 | length 3064.2
  Bottom Layer w12: U1.1 -2591.92,-1118.08 -2579,-1131 -2579,-1157 -2578,-1158
  Bottom Layer w20: -2578,-1158 -2578,-2977 -2547.19,-3007.81 -1880,-3007.81 LE11.2 -1455,-3011.81 OP10.2
RST: JP1.1 R2.1 U1.4 | length 857.1
  Bottom Layer w12: JP1.1 -3220,-1244.81 -3205,-1259.81 R2.1 -3080,-1039.81 -3071,-1030.81 -2738,-1030.81 -2716.61,-1052.2 U1.4
SWIM: JP1.3 U1.18 | length 602.8
  Bottom Layer w12: JP1.3 -2726,-995.81 -2691.02,-960.83 U1.18
VCAP: C6.1 U1.8 | length 214
  Bottom Layer w12: C6.1 -2900,-1208.81 -2891,-1199.81 -2825,-1199.81 -2818.98,-1193.79 U1.8
VCC: 0R.1@-3040,-1799.81 0R.1@-3108.11,-1451.81 0R.1@-3200,-1660.78 0R.2@-3040,-1669.81 0R.2@-3200,-1530.78 C1.2 C7.2 C90.1 C110.1 JP1.4 L1.2 LE1.1 R2.2 R7.1 R8.1 R9.1 R10.1 R11.2 R12.2 R13.2 R14.2 R17.1 R18.1 R21.1 R22.1 R23.2 R24.2 R25.2 R26.2 R29.1 R30.1 R31.2 R32.2 R201.1 R202.1 U1.9 U3.4 VR2.4 | length 23508
  Bottom Layer w12: R2.2 -2990,-1064.81 -2980,-1054.81 -2850,-1054.81 -2844.57,-1060.24 U1.9
  Bottom Layer w15: -2990,-1344.81 R2.2
  Bottom Layer w25: LE1.1 -5834,510 -5798,474 ; JP1.4 -3074.81,-895.81 -3049,-870 R202.1 R201.1 ; R30.1 -1776,-2843.81 -1740,-2807.81 -1618,-2807.81 ; R29.1 -1779,-2517.81 -1779,-2431.26 -1610,-2431.26 ; R18.1 -1776,-2094.7 -1736,-2054.7 -1618,-2054.7 ; R17.1 -1776,-1715.14 -1739,-1678.14 -1613,-1678.14 ; R22.1 -1776,-1329.59 -1748,-1301.59 -1616,-1301.59 ; R21.1 -1776,-960.03 -1741,-925.03 -1612,-925.03 ; R9.1 -1776,-551.48 -1779,-548.48 -1611,-548.48 ; R8.1 -1779,-267.81 -1779,-171.92 -1601,-171.92 ; R7.1 -1776,201.63 -1779,204.63 -1613,204.63 ; R10.1 -1779,482.19 -1779,581.19 -1613,581.19 -1373,581.19 -1353,561.19 -1353,202.19 ; R32.2 -1615,-2804.81 -1618,-2807.81 ; R31.2 -1615,-2426.26 -1610,-2431.26 ; R24.2 -1615,-2051.7 -1618,-2054.7 ; R23.2 -1613,-1616.67 -1613,-1678.14 ; R26.2 -1616,-1238.22 -1616,-1301.59 ; R25.2 -1615,-922.03 -1612,-925.03 ; R13.2 -1611,-486.33 -1611,-548.48 ; R12.2 -1601,-118.89 -1601,-171.92 ; R11.2 -1613,270.56 -1613,204.63 ; -1353,-2805.81 -1355,-2807.81 -1618,-2807.81 ; -1353,-2714.81 -1353,-2434.81 ; -1618,-2054.7 -1356.11,-2054.7 -1353,-2057.81 ; -1616,-1301.59 -1372.22,-1301.59 -1353,-1320.81 ; -1613,-1678.14 -1353.33,-1678.14 -1353,-1677.81 ; -1613,204.63 -1355.44,204.63 -1353,202.19 ; -1612,-925.03 -1353.78,-925.03 -1353,-925.81 ; -1611,-548.48 -1355.33,-548.48 -1353,-550.81 ; -1610,-2431.26 -1356.56,-2431.26 -1353,-2434.81 ; -1601,-171.92 -1354.11,-171.92 -1353,-170.81 ; -1353,-2434.81 -1353,-2057.81 ; -1353,-2057.81 -1353,-1677.81 ; -1353,-1677.81 -1353,-1320.81 ; -1353,-1320.81 -1353,-925.81 ; -1353,-925.81 -1353,-550.81 ; -1353,-550.81 -1353,-170.81 ; -1353,-170.81 -1353,202.19
  Bottom Layer w30: VR2.4 -4807,233.19 -4744,170.19 -4744,-190.81 -4712,-222.81 -3575,-222.81 -3532,-265.81 -3532,-1296.81 -3484,-1344.81 -2990,-1344.81 C7.2 ; C110.1 -4635,-2198.81 C90.1 -4617,-2772.81 L1.2 -4095,-2808.81 U3.4 ; -3514,-895.81 JP1.4 ; 0R.1@-3200,-1660.78 -3049.03,-1660.78 0R.2@-3040,-1669.81 ; 0R.2@-3200,-1530.78 -3200,-1462.81 -3189,-1451.81 -3108.11,-1451.81 -3108.11,-1360.92 -3097,-1349.81 ; R14.2 -1615,583.19 -1613,581.19
  Bottom Layer w35: -5798,474 -5798,245.19 VR2.4 ; C110.1 -5011,-3095.81 -4964,-3142.81 -1393,-3142.81 -1353,-3102.81 -1353,-2805.81 -1353,-2714.81 ; -3040,-3136 0R.1@-3040,-1799.81
pads on no net: U1.6 U1.10 U3. VR1.1 VR1.2 VR1.3 VR2.1 VR2.2 VR2.3

## Polygon pours and split planes (outlines as drawn)
no net on Bottom Layer "Keep-Out Layer-No Net" (hatched 90Degree grid 20 track 8, pour order 6): -6100,884 -6100,-3382 -176,-3382 -159,-3382 -159,880

## Keep-outs
Keep-Out Layer:
  the board outline again, w8

## Text inside footprints (layer, text, board x,y; h text height)
C100: Top Overlay "+" at -4343,-2169.81 h47.24 r90
C110: Top Overlay "+" at -4981,-2258.81 h80 r270
JA1: Top Overlay "AC" at -4327,-4.81 h60 r270; Top Overlay "+" at -4637,-994.81 h60 r270; Top Overlay "-" at -4027,-1024.81 h60 r270
LE1: Top Overlay "+" at -5889,400 h80 r90
LE2: Top Overlay "+" at -1916,214.19 h80 r270
LE3: Top Overlay "+" at -1916,-162.81 h80 r270
LE4: Top Overlay "+" at -1916,-539.81 h80 r270
LE5: Top Overlay "+" at -1916,591.19 h80 r270
LE6: Top Overlay "+" at -1916,-1670.81 h80 r270
LE7: Top Overlay "+" at -1916,-2047.81 h80 r270
LE8: Top Overlay "+" at -1916,-916.81 h80 r270
LE9: Top Overlay "+" at -1916,-1293.81 h80 r270
LE10: Top Overlay "+" at -1916,-2424.81 h80 r270
LE11: Top Overlay "+" at -1916,-2801.81 h80 r270